# Altium PCB Power&CH341T.PcbDoc
Units mil, origin at the board's own origin, x right, y up, seen from the top; angles counter-clockwise.
Board outline 1305 x 1310 mil, 2 copper layers (Top Layer, Bottom Layer); 28 components, 19 nets, 104 pads, 57 vias.
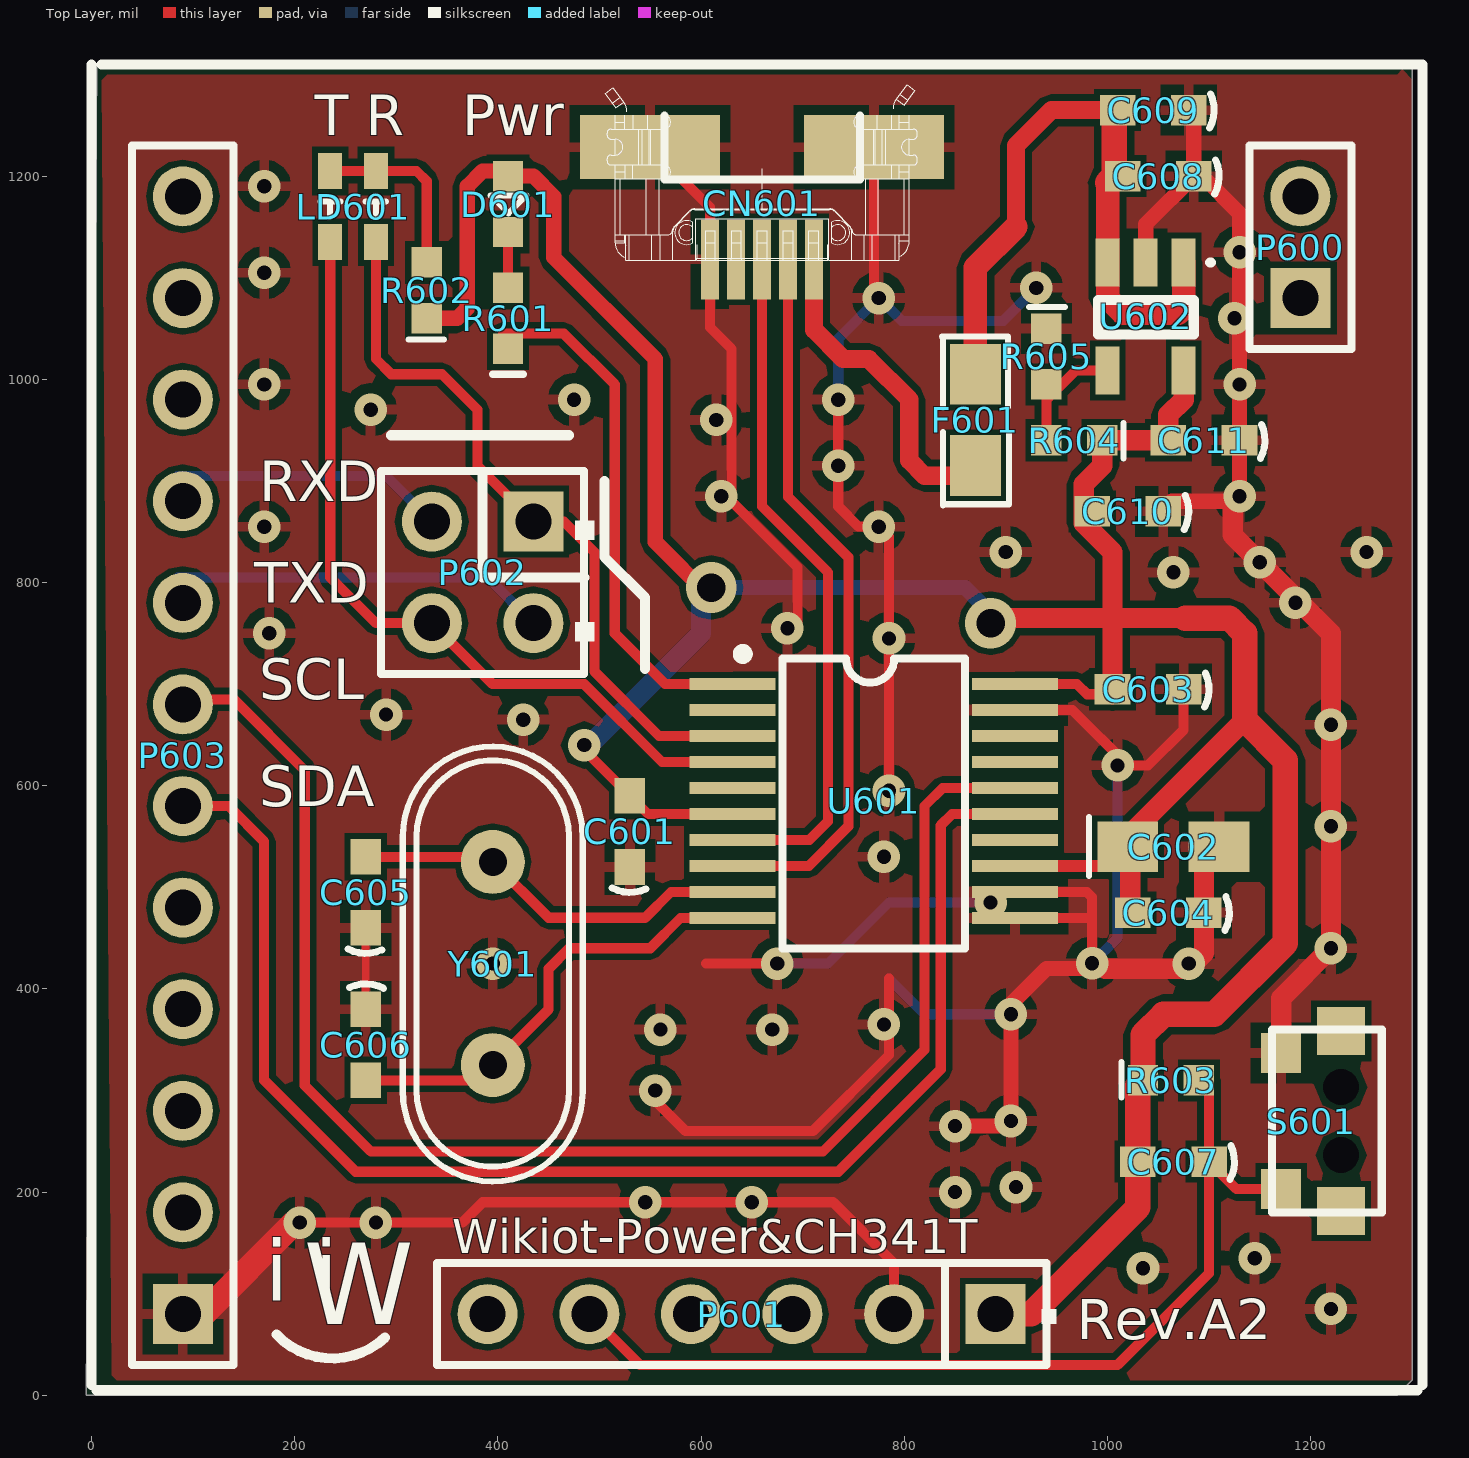
[diagram p0: Top Layer view]
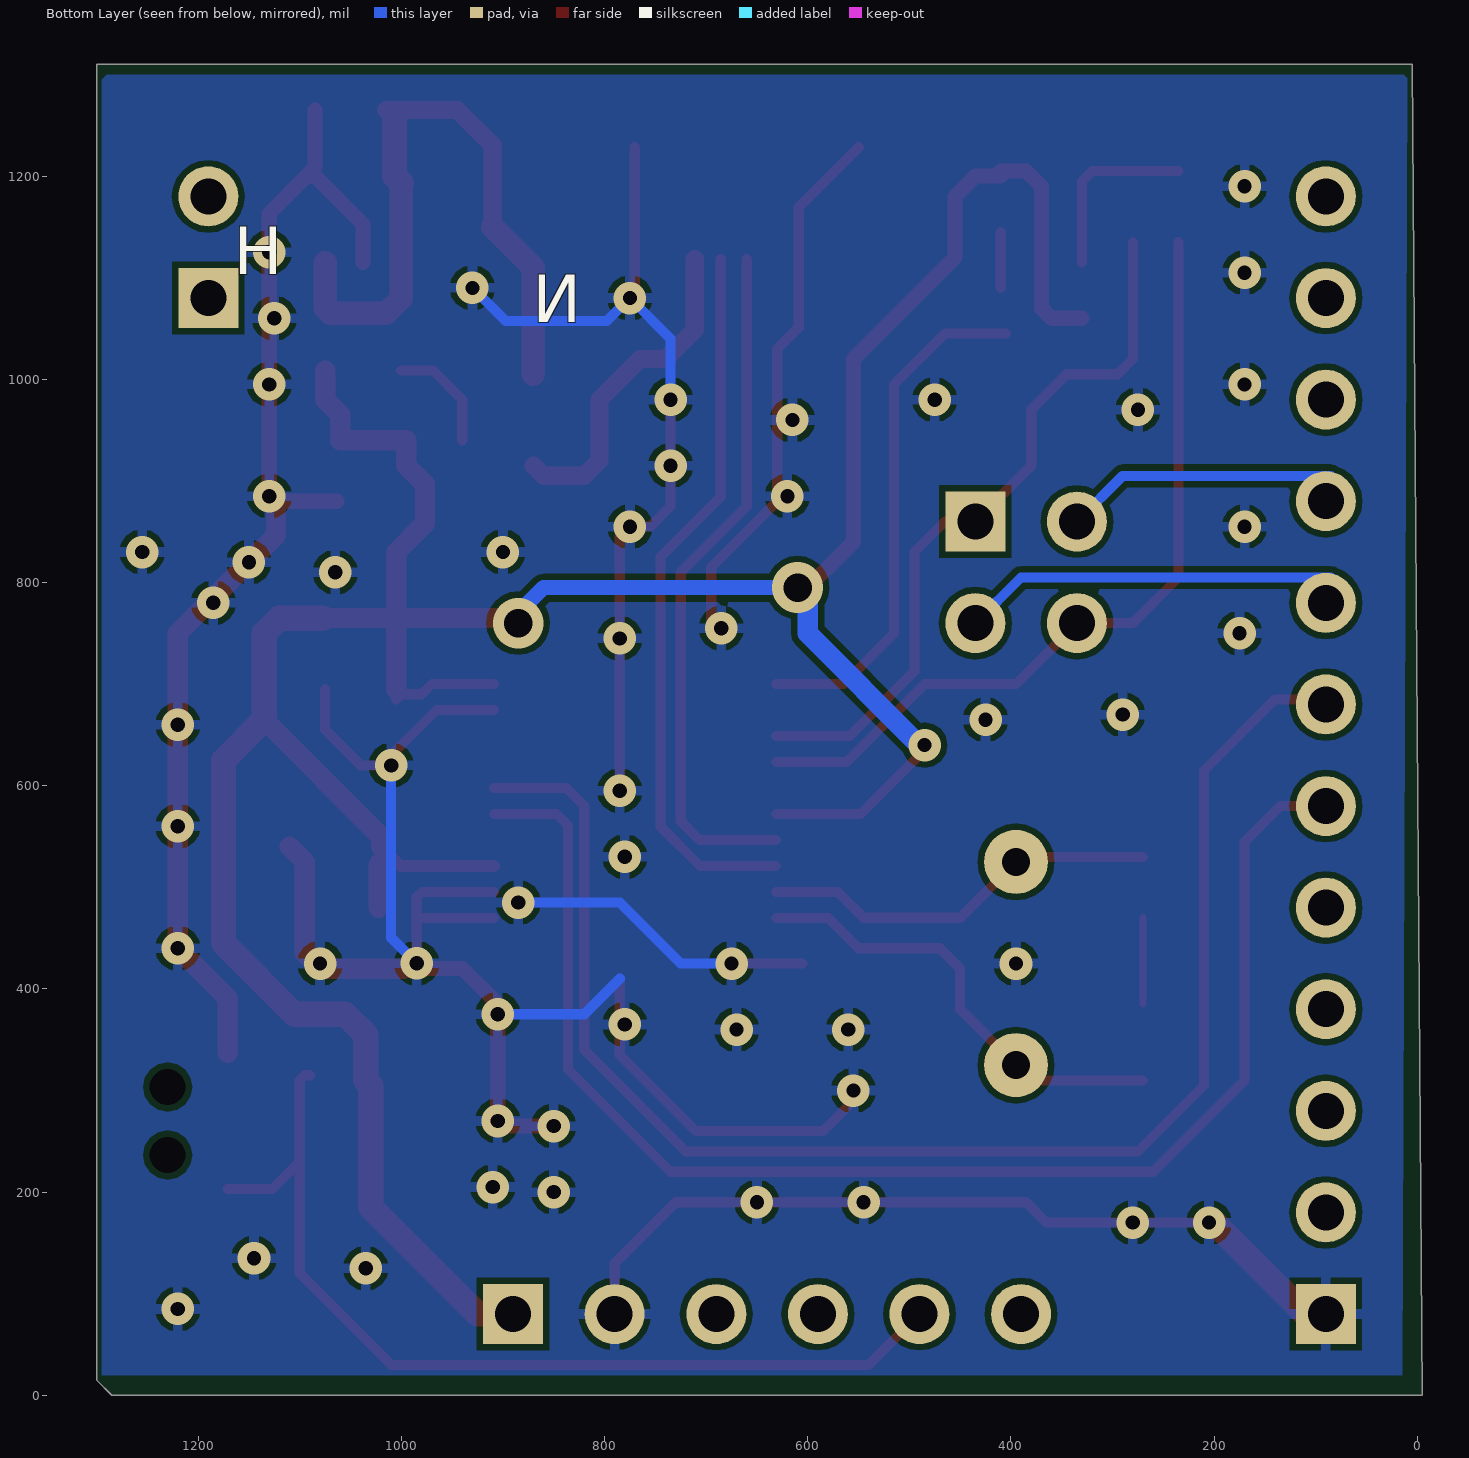
[diagram p1: Bottom Layer view, seen from below]

## Layer stack, top to bottom
Top Solder: solder mask 0.4, Solder Resist, Dk 3.5
Top Layer: signal copper 1.4
Dielectric1: dielectric 12.6, FR-4, Dk 4.8
Bottom Layer: signal copper 1.4
Bottom Solder: solder mask 0.4, Solder Resist, Dk 3.5

## Board outline
5,1310 1300,1310 1300,15 1285,0 -5,0

## Design rules (kind name [scope] priority, off if disabled: settings)
Clearance [All] p1: gap=6
PolygonConnect [All] p1: connectstyle=Relief reliefconductorwidth=10 reliefentries=4 polygonreliefangle="90 Angle" airgapwidth=10
RoomDefinition Power&CH341T [InComponentClass('Power&CH341T')] p1: confinementstyle=ConfineIn formatcopy=TRUE lockcomponents=FALSE outline 5,1310 1315,1310 1315,10 5,10
RoutingVias [All] p1: holewidth=12 width=25 viastyle="Through Hole" minholewidth=12 minwidth=25 maxholewidth=28 maxwidth=50
SolderMaskExpansion [All] p1: expansion=4
Width [All] p1: maxlimit=55 minlimit=7 preferedwidth=10
29 further rules are at their usual default settings.

## Components (designator, comment, footprint, x,y, rotation, side; value= is the part's Value field where it differs from the comment)
C601 "0.1uF" C0603L 530,555 r90 top
C602 "1uF" 0805M 1020,540 r0 top
C603 "Cap" C0603L 1040,695 r180 top
C604 "Cap" C0603L 1060,475 r180 top
C605 "Cap" C0603L 270,495 r90 top
C606 "Cap" C0603L 270,345 r270 top
C607 "10uF" C0603L 1065,230 r180 top
C608 "Cap" C0603L 1050,1200 r180 top
C609 "Cap" C0603L 1045,1265 r180 top
C610 "Cap" C0603L 1020,870 r180 top
C611 "Cap" C0603L 1095,940 r180 top
CN601 "USB-Micro" USB-MICRO-Lite 660,1225 r0 top
D601 "LED1" 0603pn 410,1200 r270 top
F601 "500mA" 0805 870,1005 r270 top
LD601 "LTST-C195KGJRKT" 0805-LED-Bi 255,1130 r90 top
P600 "Header 2" HDR1X2 1190,1080 r90 top
P601 "Synio Power Header 6 Pin" HDR1X6/2.54MM 890,80 r180 top
P602 "Header 2X2" HDR2X2/2.54MM 435,860 r180 top
P603 "Synio Header-L 12-Pin" HDR1X12 90,80 r90 top
R601 "1K" R0603 410,1060 r90 top
R602 "1K" 0603M 330,1060 r90 top
R603 "10K" 0603M 1035,310 r0 top
R604 "NC" 0603M 995,940 r180 top
R605 "NC" 0603M 940,1050 r270 top
S601 "RESET" KEY-2x4-SMD 1230,270 r270 top
U601 "CH341T" SSOP20 770,585 r270 top
U602 "LDO" SOT23-5 1075,1115 r180 top
Y601 "12MHz" XTAL_49S 395,425 r90 top

## Footprints (in the part's own frame and the unit in brackets; to place one, negate y for a bottom-side part, rotate by r counter-clockwise, add the part's x,y. Pads: shape width x height; smd on the part's side, far side on the other; paste and mask are expansions set on the pad)
0603M [mil]
  rect 30x30 smd: 1(0,0) 2(55,0)
  silkscreen extent -21,-17 -21,18, body extent -5,-15 60,15, height 43
0603pn [mil]
  rect 30x30 smd: 1(0,0) 2(55,0)
  silkscreen extent 19,-17 36,18
0805 [mil]
  rect 60x50 smd: 1(0,0) 2(90,0)
  silkscreen extent -37,-33 129,33
0805-LED-Bi [mm]
  rect 0.9x0.6 smd: 1(0.127,-0.635) 2(0.127,0.508) 3(1.905,0.508) 4(1.905,-0.635)
  silkscreen extent 0.76,-0.89 1.14,0.76, body extent 0.32,-1.02 1.72,0.9, height 1.1
0805M [mil]
  rect 60x50 smd: 1(0,0) 2(90,0)
  silkscreen extent -38,-29 -38,29
C0603L [mil]
  rect 35x30 smd: 1(-35,0) 2(35,0)
  silkscreen extent -60,-16 -56,18, body extent -31,-16 32,15, height 24
HDR1X2 [mm] "Connector; Header; 2 Position"
  rect 1.5x1.5 hole 0.9: 1(0,0)
  round 1.5 hole 0.9: 2(2.54,0)
  silkscreen extent -1.27,-1.27 3.81,1.27
HDR1X6/2.54MM [mm] "Connector; Header; 6 Position"
  rect 1.5x1.5 hole 0.9: 1(0,0)
  round 1.5 hole 0.9: 2(2.54,0) 3(5.08,0) 4(7.62,0) 5(10.16,0) 6(12.7,0)
  silkscreen extent -1.52,-1.27 13.97,1.27
HDR1X12 [mm] "Connector; Header; 12 Position"
  rect 1.5x1.5 hole 0.9: 1(0,0)
  round 1.5 hole 0.9: 2(2.54,0) 3(5.08,0) 4(7.62,0) 5(10.16,0) 6(12.7,0) 7(15.24,0) 8(17.78,0) 9(20.32,0) 10(22.86,0) 11(25.4,0) 12(27.94,0)
  silkscreen extent -1.27,-1.27 29.21,1.27
HDR2X2/2.54MM [mm] "Connector; Header; 2x2 Position"
  rect 1.5x1.5 hole 0.9: 1(0,0)
  round 1.5 hole 0.9: 2(0,2.54) 3(2.54,0) 4(2.54,2.54)
  silkscreen extent -1.52,-1.27 3.81,3.81
KEY-2x4-SMD [mm] "6.8MM,2.8MM,SMD"
  rect 1.2x1.2 smd: 0(-2.25,0) 0(2.25,0)
  rect 1x1 smd: 1(-1.7,-1.5) 2(1.7,-1.5)
  round 0.8 hole 0.9 unplated: MH1(0.85,0) MH2(-0.85,0)
  silkscreen extent -2.29,-1.73 2.29,1.02, body extent -2.28,-1.6 2.29,0.94, height 1.1
R0603 [mil]
  rect 30x30 smd: 1(-30,0) 2(30,0)
  silkscreen extent -55,-15 -55,15, body extent -31,-16 32,15, height 18
SOT23-5 [mm]
  rect 0.6x1.2 smd: 1(0,0) 2(0.95,0) 3(1.9,0) 4(1.9,2.7) 5(0,2.7)
  silkscreen extent -0.69,0 2.13,1.8, body extent -0.32,0.7 2.35,2.1, height 1.1
SSOP20 [mm] "SSOP, Plastic; 20 Leads; Body Width 5.3 mm; Pitch 0.65 mm"
  rect 0.3x2.15 smd: 1(-2.925,-3.529) 2(-2.275,-3.529) 3(-1.625,-3.529) 4(-0.975,-3.529) 5(-0.325,-3.529) 6(0.325,-3.529) 7(0.975,-3.529) 8(1.625,-3.529) 9(2.275,-3.529) 10(2.925,-3.529) 11(2.925,3.529) 12(2.275,3.529) 13(1.625,3.529) 14(0.975,3.529) 15(0.325,3.529) 16(-0.325,3.529) 17(-0.975,3.529) 18(-1.625,3.529) 19(-2.275,3.529) 20(-2.925,3.529)
  silkscreen extent -3.8,-3.4 3.68,2.29
USB-MICRO-Lite [mm] "Connector; USB2.0, Type B, SM; 5 Position; Right Angle"
  rect 3.5x1.6 smd: 0(-2.802,0.088) 0(2.798,0.088)
  rect 0.45x2 smd: 1(1.298,-2.714) 2(0.648,-2.714) 3(-0.002,-2.714) 4(-0.652,-2.714) 5(-1.302,-2.714)
  silkscreen extent -3.92,-2.74 3.88,1.65
XTAL_49S [mm] "Hole 1.6mm"
  round 1.6 hole 0.7: 1(2.54,0) 2(-2.54,0)
  silkscreen extent -5.45,-2.25 5.42,2.25

## Part data
C601 C607: library part Cap, "Capacitor"
C602: library part "Cap Pol1", "Polarized Capacitor (Radial)"
C603 C604 C605 C606 C608 C610: "Capacitor"
C609 C611: library part CAP, "Capacitor"
D601: "Typical RED GaAs LED"
F601: library part "Fuse 1", "Fuse"
LD601: "Avago, HSMF-A203 Bi-Color LED"
P600: "Header, 2-Pin"
P602: "Header, 2-Pin, Dual row"
P603: "Synio Header-L, 12-Pin"
R601: library part Res, "Resistor"
R602 R603 R604 R605: library part Res2, "Resistor"
S601: library part SW-PB, "Switch"
U602: library part LDO-SOT23-5, "General LDO SOT23-5"
Y601: library part XTAL, "Crystal Oscillator"

## Via types
v1: diameter 32, hole 14, Top Layer to Bottom Layer, 55 vias
v2: diameter 50, hole 28, Top Layer to Bottom Layer, 2 vias

## Nets (pads, with @x,y where several pads share a name; then routed paths per layer and width w, separated by ;. In a path a pad name is that pad's centre, name@x,y a point inside that pad or via, vN(x,y) a via of type N, cw(c..) or ccw(c..) an arc to the next point about the centre after c; other vN are vias at no path point)
D3V3: C601.2 C602.1 C603.2 C604.2 C607.2 C610.2 C611.2 D601.1 P601.1 R602.1 R603.1 R604.1 U601.6 U601.13 U601.20 U602.5 | length 3394.5
  Top Layer w10: v1@485,645 480,640 C601.2 547.8,572.2 U601.6 ; U601.20@908.78,700 U601.20 960,700.16 969.84,700.16 980,690 C603.2@1000,690 ; C603.2@1005,685 C603.2@1000,690 ; C603.2 C603.2@1000,690 ; C602.1@1021.02,521.02 C602.1@1022.5,522.5
  Top Layer w12: U601.13 1001.02,521.02 C602.1
  Top Layer w15: R602.1 360,1060 370,1070 370,1190 385,1205 D601.1@410,1205 ; D601.1 435,1200 455,1180 455,1120 555,1020 555,840 v2@610,785
  Top Layer w20: v2(885,760) 890,765 1005,765 ; C603.2 1005,765 ; C602.1@1020,525 1022.5,522.5 C604.2@1022.5,480 ; C602.1 1020,550 1135,665 ; U602.5 1075,980 1060,965 C611.2 R604.1 995,915 976.69,896.69 976.69,858.31 1005,830 1005,765 ; 1076.69,765 1005,765
  Top Layer w25: P601.1 925,80 1030,185 C607.2 1030,305 R603.1 1035,355 1055,375 1105,375 1175,445 1175,625 1135,665 1135,750 1120,765 1076.69,765
  Bottom Layer w15: v2(610,795) 860,795 895,760 v2(885,760)
  Bottom Layer w20: v1(485,640) 490,640 600,750 600,785 v2(610,795)
D5V: C608.2 C609.2 F601.1 U602.1 U602.3 | length 680.4
  Top Layer w18: 910,1150 910,1230 945,1265 1015,1265 C609.2@1006.69,1256.69
  Top Layer w23: F601.1 870,1110 910,1150 ; C608.2@1000.2,1193.5 U602.3 1000.2,1079.8 1015,1065 1070,1065 1075,1070 U602.1
  Top Layer w25: C608.2@1000.2,1193.5 1006.69,1200 C609.2@1006.69,1256.69
GND: C601.1 C602.2 C603.1 C604.1 C605.1 C606.1 C608.1 C609.1 C610.1 C611.1 CN601.0 CN601.5 P601.2 P603.1 R605.1 S601.1 U601.11 U601.12 U601.19 U602.2 | length 5540
  Top Layer w7: C606.1@270,385 C605.1 C605.1@270,470
  Top Layer w10: v1@200,170 v1(205,170) v1(280,170) 365,170 385,190 v1(545,190) v1(650,190) 730,190 790,130 P601.2 P601.2@790,60 ; CN601.0@549.7,1228.46 608.76,1169.4 CN601.5 608.76,1051.24 630,1030 630,880 695,815 695,755 v1(685,755) ; v1@560,310 555,305 v1(555,300) 555,290 585,260 710,260 785,335 785,410 ; 605,425 v1(675,425) ; v1(735,980) v1(735,915) 735,875 755,855 v1(775,855) 785,845 v1(785,745) v1(785,595) v1@785,590 ; CN601.0@770.17,1228.46 770.17,1084.83 v1(775,1080) ; U601.11 984.84,469.84 ; U601.12 979.57,495.43 984.84,490.16 984.84,469.84 ; U601.19 965.43,674.57 1020,620 1040,620 1075,655 1075,690 C603.1 ; v1(984.84,425.16) 984.84,469.84 ; C604.1@1100,475 C602.2@1100,525
  Top Layer w15: v1@860,265 905,265 905,385 940,420 v1@997.87,420 ; U602.2 1037.6,1152.6 C608.1 C608.1@1093.31,1200 ; C610.1@1063.31,880 1125,880 v1(1130,885) C611.1 1130,1163.31 C608.1@1093.31,1200 ; C609.1@1085,1265 1085,1208.31 C608.1@1093.31,1200
  Top Layer w20: v1@997.87,420 1080,420 1095,435 C604.1 1095,525 C602.2 ; v1@1125,880 1123.31,878.31 1123.31,846.69 v1(1150,820) 1220,750 v1(1220,660) v1(1220,560) v1(1220,440) 1170.94,390.94 S601.1
  Top Layer w25: P603.1 110,80 v1@200,170
  Bottom Layer w10: v1(675,425) 725,425 785,485 v1(885,485) ; v1(685,755) v1@685,760 ; v1(735,980) 735,1040 v1(775,1080) 797.5,1057.5 897.5,1057.5 v1(930,1090) ; 785,410 820,375 v1(905,375) ; v1(984.84,425.16) 1010,450.32 v1(1010,620)
  other v1: 1220,85 1035,125 1145,135 850,200 910,205 850,265 905,270 560,360 670,360 780,365 395,425 1080,425 780,530 425,665 290,670 175,750 1185,780 1065,810 900,830 1255,830 170,855 620,885 615,960 275,970 475,980 170,995 1130,995 1125,1060 170,1105 1130,1125 170,1190
NACT: R601.1 U601.1 | length 512.4
  Top Layer w10: 405,1045 465,1045 515,995 515,750 564.84,700.16 U601.1
NetC605_2: C605.2 U601.9 Y601.1 | length 396.5
  Top Layer w10: C605.2 390,530 Y601.1 450,470 545,470 570.43,495.43 U601.9
NetC606_2: C606.2 U601.10 Y601.2 | length 450.7
  Top Layer w10: C606.2 380,310 Y601.2 450,380 450,420 470,440 550,440 579.84,469.84 U601.10
NetC607_1: C607.1 P601.5 R603.2 S601.2 | length 952.2
  Top Layer w10: P601.5 540,30 1010,30 1100,120 C607.1 ; R603.2@1090,315 1095,315 1100,310 C607.1 ; S601.2 1126.93,203.07 C607.1
NetCN601_1: CN601.1 F601.2 | length 327
  Top Layer w18: CN601.1 711.12,1048.88 740,1020 765,1020 805,980 805,920 820,905 860,905 F601.2
NetCN601_2: CN601.2 U601.8 | length 712.9
  Top Layer w10: U601.8 706.02,521.02 745,560 745,825 685.53,884.47 CN601.2
NetCN601_3: CN601.3 U601.7 | length 681.6
  Top Layer w10: U601.7 706.61,546.61 725,565 725,810 659.94,875.06 CN601.3
NetD601_2: D601.2 R601.2 | length 55
  Top Layer w10: R601.2 D601.2
NetLD601_3: LD601.3 LD601.4 R602.2 | length 179.1
  Top Layer w10: LD601.3 LD601.4 320,1205 330,1195 R602.2
NetR604_2: R604.2 R605.2 U602.4 | length 112.1
  Top Layer w10: R604.2 940,980 968.7,1008.7 U602.4
RX0: P602.3 P603.9 | length 268.6
  Bottom Layer w10: P603.9@85,905 290,905 P602.3
RXD: LD601.1 P602.1 U601.3 | length 720.7
  Top Layer w10: LD601.1 280,1020 295,1005 345,1005 380,970 380,915 P602.1 465,860 495,830 495,712.63 558.65,648.98 U601.3
SCL: P603.7 U601.16 | length 1485.7
  Top Layer w10: P603.7 110,680 105,685 140,685 210,615 210,305 275,240 720,240 820,340 820,580 837.8,597.8 U601.16
SDA: P603.6 U601.15 | length 1392.2
  Top Layer w10: P603.6 135,580 170,545 170,310 260,220 735,220 836,321 836,561 847.2,572.2 U601.15
TX0: P602.2 P603.8 | length 368.6
  Bottom Layer w10: P603.8@85,805 390,805 P602.2
TXD: LD601.2 P602.4 U601.4 | length 801.3
  Top Layer w10: LD601.2 235,805 280,760 P602.4 395,700 485,700 561.61,623.39 U601.4
pads on no net: CN601.4 P600.1 P600.2 P601.3 P601.4 P601.6 P603.2 P603.3 P603.4 P603.5 P603.10 P603.11 P603.12 S601.0 S601.MH1 S601.MH2 U601.2 U601.5 U601.14 U601.17 U601.18

## Polygon pours and split planes (outlines as drawn)
GND on Bottom Layer "Top Layer-No Net" (solid, remove dead copper, pour order 25): 10,1300 1290,1300 1295,1295 1295,20 15,20
GND on Top Layer "Top Layer-GND" (solid, remove dead copper, pour order 22): 20,20 25,15 1300,15 1300,1295 1290,1305 1285,1300 10,1300

## Silkscreen, mask and mechanical layers (free items; w line width, h text height)
Top Overlay:
  lines w10: 0,10 0,1310 ; 5,5 1305,5 ; 10,1310 1310,1310 1310,10 ; 182,60 ccw(c237,112) 289,57 ; 295,945 470,945 ; 505,900 505,825 545,785 545,715
  text "T" at 220,1240 h40
  text "R" at 270,1240 h40
  text "Pwr" at 365,1240 h40
  text "RXD" at 165,880 h40
  text "TXD" at 160,780 h40
  text "SCL" at 165,685 h40
  text "SDA" at 165,580 h40
  text "Wikiot-Power&CH341T" at 355,140 h33.46
  text "i i" at 171,93 h60
  text "W" at 209,70 h80
  text "Rev.A2" at 970,55 h39.37
Bottom Overlay:
  text "H" at 1165,1088 h80
  text "N" at 823,1041 h80